# Altium PCB PCB1.PcbDoc
Units mm, origin at the board's own origin, x right, y up, seen from the top; angles counter-clockwise.
Board outline 152.4 x 101.6 mm, 2 copper layers (Top Layer, Bottom Layer); 21 components, 18 nets, 54 pads, 10 vias.
Unrouted connection lines stored in the file: 24.
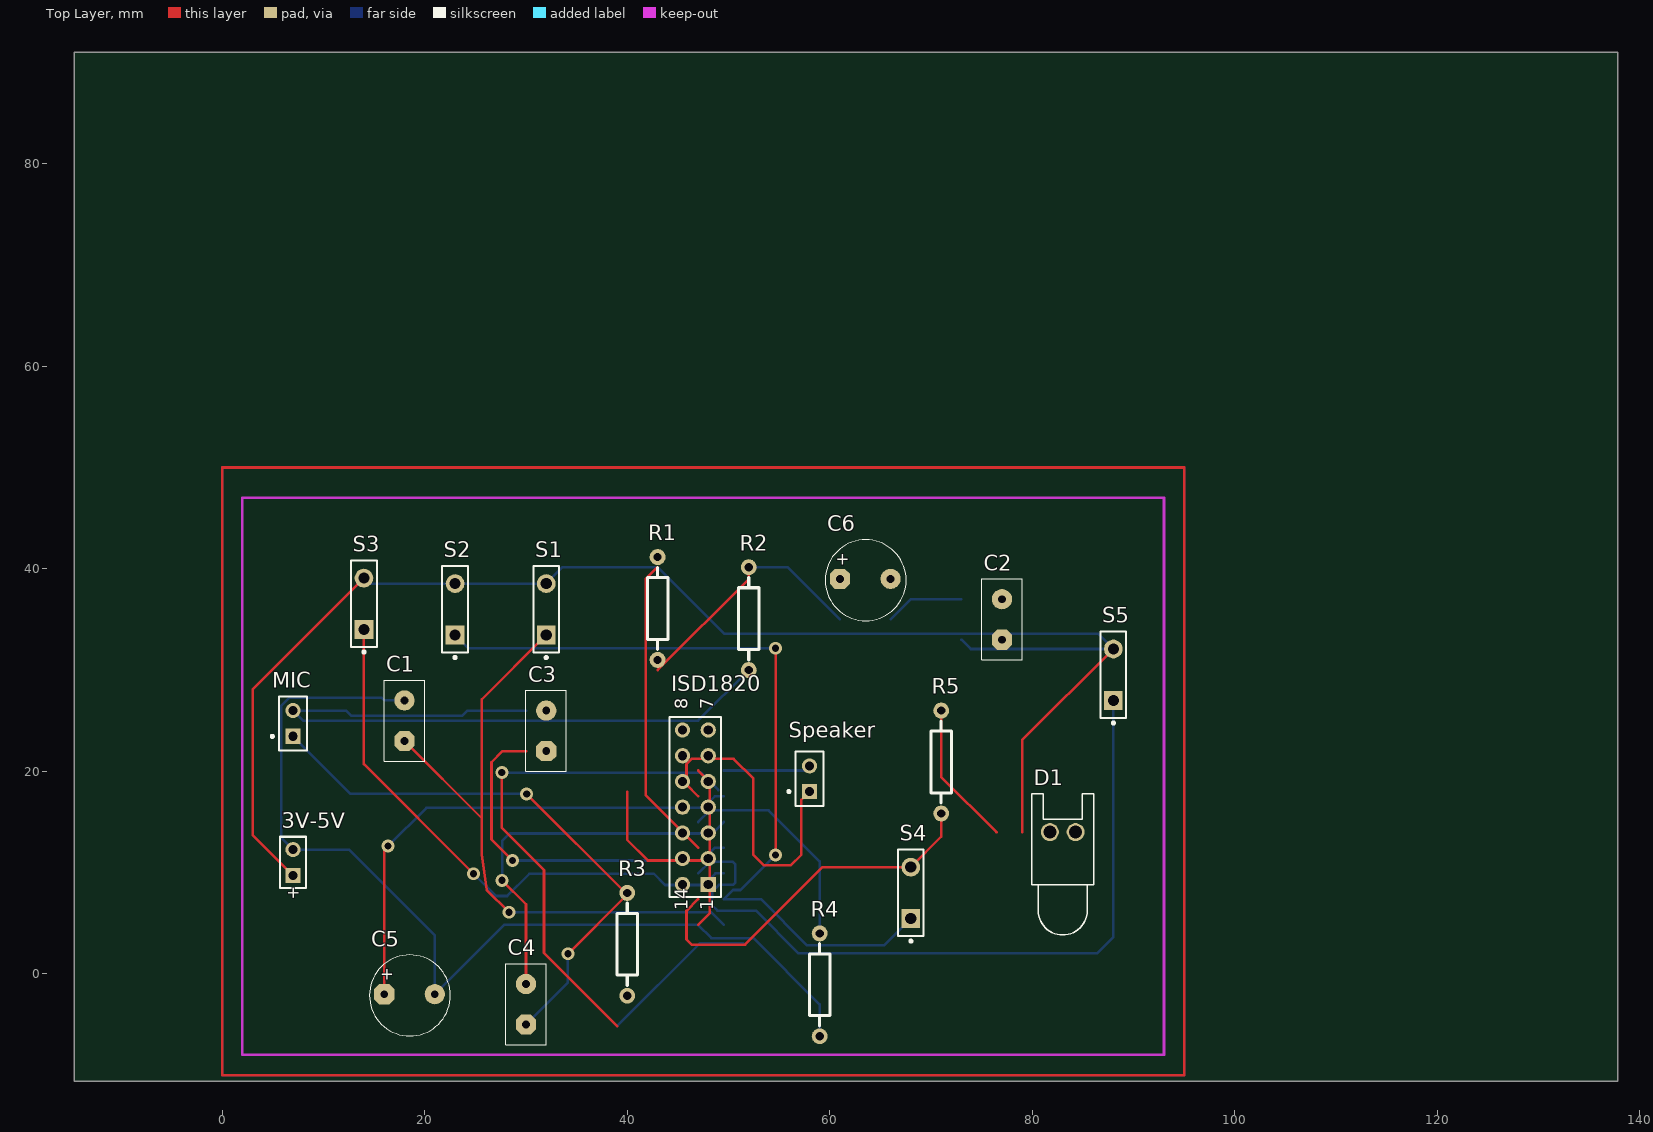
[diagram p0: Top Layer view]
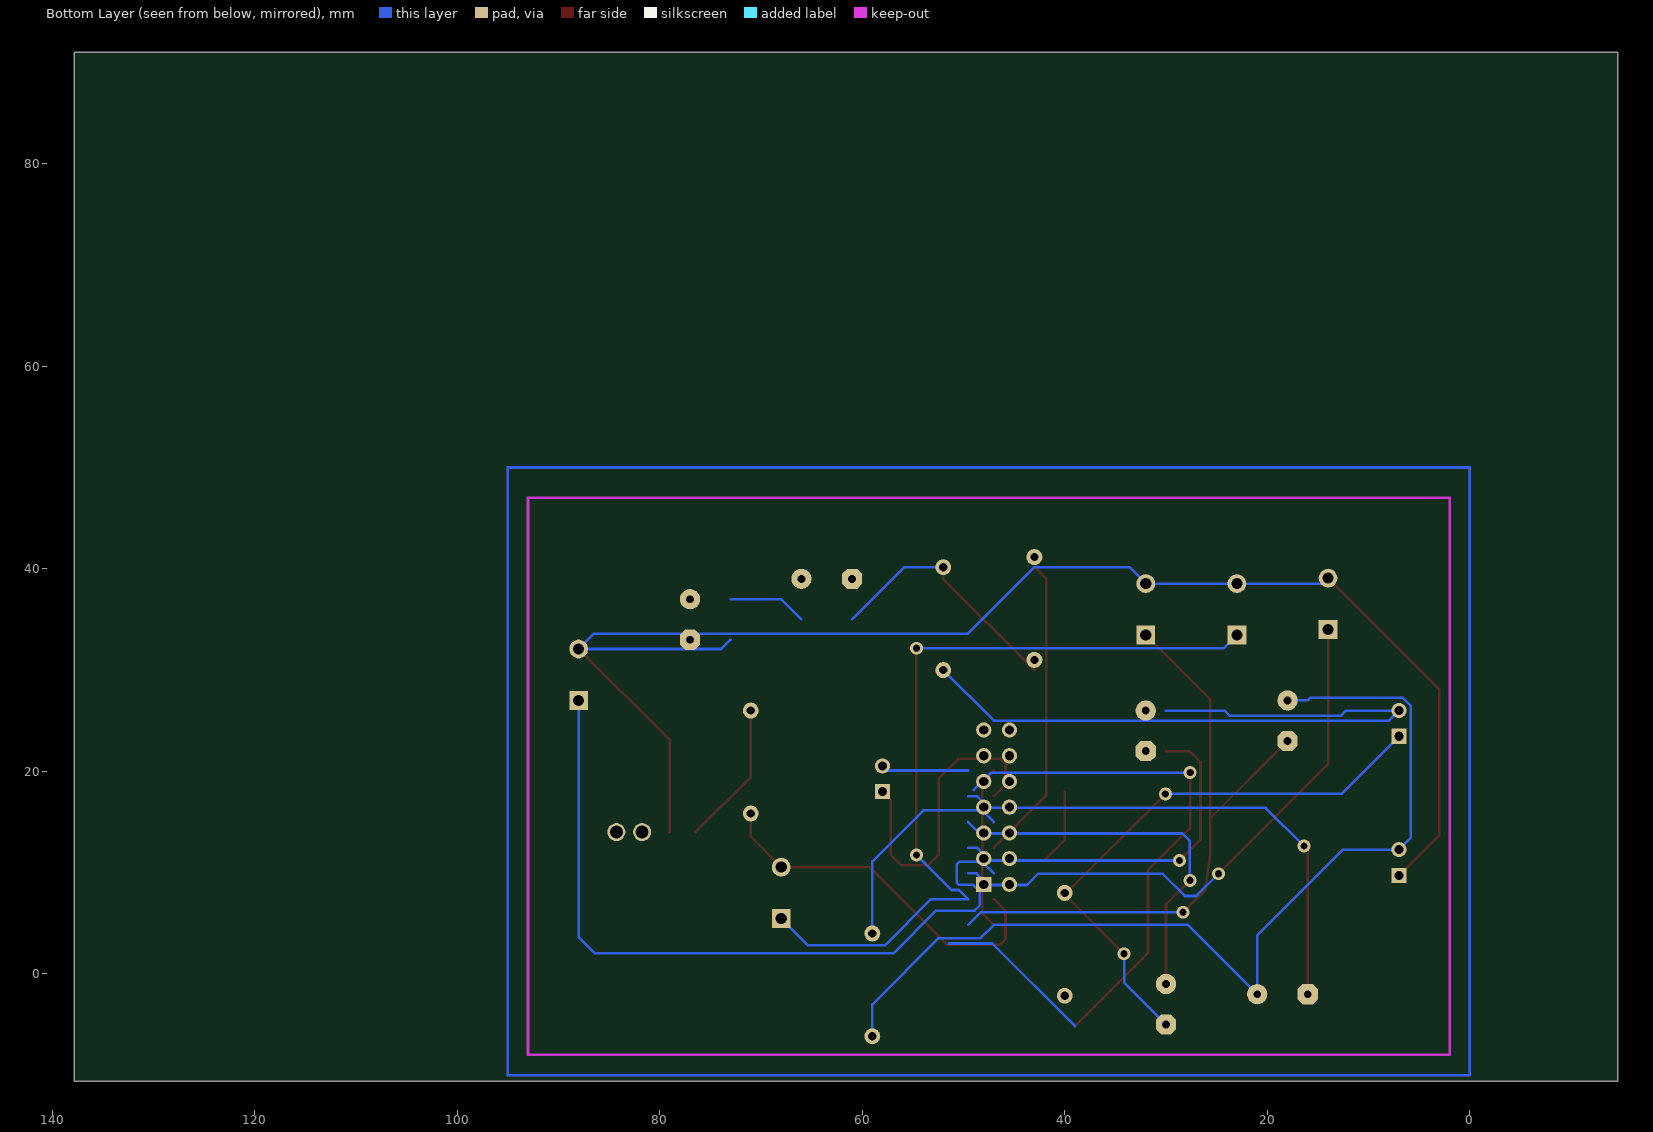
[diagram p1: Bottom Layer view, seen from below]

## Layer stack, top to bottom
Top Solder: solder mask 0.0102, Solder Resist, Dk 3.5
Top Layer: signal copper 0.0356
Dielectric 1: dielectric 0.32, FR-4, Dk 4.8
Bottom Layer: signal copper 0.0356
Bottom Solder: solder mask 0.0102, Solder Resist, Dk 3.5

## Board outline
-14.6,-10.6 137.8,-10.6 137.8,91 -14.6,91

## Design rules (kind name [scope] priority, off if disabled: settings)
Clearance [All] p1: gap=0.254
PolygonConnect [All] p1: connectstyle=Relief reliefconductorwidth=0.254 reliefentries=4 polygonreliefangle="90 Angle" airgapwidth=0.254
RoomDefinition Sheet1 [InComponentClass('Sheet1')] p1: confinementstyle=ConfineIn formatcopy=TRUE lockcomponents=FALSE outline -40,-36 10.8,-36 10.8,-10.6 -40,-10.6
RoutingVias [All] p1: holewidth=0.711 width=1.27 viastyle="Through Hole" minholewidth=0.711 minwidth=1.27 maxholewidth=0.711 maxwidth=1.27
SolderMaskExpansion [All] p1: expansion=0.102
Width [All] p1: maxlimit=0.254 minlimit=0.254 preferedwidth=0.254
30 further rules are at their usual default settings.

## Components (designator, comment, footprint, x,y, rotation, side; value= is the part's Value field where it differs from the comment)
3V-5V "Battery" BAT-2 7,11 r90 top
C1 "0.001uf" RAD4 18,23 r90 top
C2 "0.1uf" RAD4 77,33 r90 top
C3 "0.1uf" RAD4 32,22 r90 top
C4 "0.1uf" RAD4 30,-5 r90 top
C5 "4.7uf" RB5/8 16,-2 r0 top
C6 "220uf" RB5/8 61,39 r0 top
D1 "LED0" LED-0 83,14 r0 top
ISD1820 "" HDR2X7_CEN 48,8.84 r90 top
MIC "MIC" PIN2 7,23.46 r90 top
R1 "1K" AXIAL0.4 43,31 r90 top
R2 "4.7k" AXIAL0.4 52,30 r90 top
R3 "4.7K" AXIAL0.4 40,-2.16 r90 top
R4 "100K" AXIAL0.4 59,-6.16 r90 top
R5 "10K" AXIAL0.4 71,15.84 r90 top
S1 "REC" SPST-2 32,36 r90 top
S2 "PLAYE" SPST-2 23,36 r90 top
S3 "PLAYL" SPST-2 14,36.54 r90 top
S4 "循环放音" SPST-2 68,8 r90 top
S5 "直通" SPST-2 88,29.54 r90 top
Speaker "8欧0.5W" PIN2 58,18 r90 top

## Footprints (in the part's own frame and the unit in brackets; to place one, negate y for a bottom-side part, rotate by r counter-clockwise, add the part's x,y. Pads: shape width x height; smd on the part's side, far side on the other; paste and mask are expansions set on the pad)
AXIAL0.4 [mil]
  round 62 hole 32: 1(0,0) 2(400,0)
  silkscreen extent 40,-40 360,40
BAT-2 [mm] "Battery; 2 Leads"
  rect 1.5x1.5 hole 0.9: 1(-1.27,0)
  round 1.5 hole 0.9: 2(1.27,0)
  silkscreen extent -2.54,-1.27 2.54,1.27
HDR2X7_CEN [mm] "Connector; Header; 7x2 Position"
  rect 1.5x1.5 hole 0.9: 1(0,0)
  round 1.5 hole 0.9: 2(2.54,0) 3(5.08,0) 4(7.62,0) 5(10.16,0) 6(12.7,0) 7(15.24,0) 8(15.24,2.54) 9(12.7,2.54) 10(10.16,2.54) 11(7.62,2.54) 12(5.08,2.54) 13(2.54,2.54) 14(0,2.54)
  silkscreen extent -1.27,-1.27 16.51,3.81
LED-0 [mil] "LED; 2 Leads"
  round 70 hole 50: 1(50.01,0) 2(-49.99,0)
  silkscreen extent -120,-400 120,150
PIN2 [mm] "Photosensitive Diode; 2 Leads"
  rect 1.5x1.5 hole 0.9: 1(0,0)
  round 1.5 hole 0.9: 2(2.54,0)
  silkscreen extent -1.4,-1.4 3.94,2.17
RAD4 [mm]
  oct 2x2 hole 0.762: 1(0,0)
  round 2 hole 0.762: 2(4,0)
  silkscreen extent -2,-2 6,2
RB5/8 [mm]
  oct 2x2 hole 0.762: 1(0,0)
  round 2 hole 0.762: 2(5,0)
  silkscreen extent -1.46,-4.13 6.54,3.87
SPST-2 [mm] "Switch; 2 Leads"
  rect 1.85x1.85 hole 1.1: 1(-2.54,0)
  round 1.85 hole 1.1: 2(2.54,0)
  silkscreen extent -4.89,-1.27 4.28,1.27

## Part data
3V-5V: "Multicell Battery"
C1 C2 C3 C4: library part CAP, "Capacitor"
C5 C6: library part ELECTRO2, "Electrolytic Capacitor"
D1: "Typical INFRARED GaAs LED"
ISD1820: library part "Header 7X2A", "Header, 7-Pin, Dual row"
MIC: library part Mic2, "Microphone"
R1 R2 R3 R4 R5: library part RES2
S1 S2 S3: library part SW-PB, "Switch"
S4 S5: library part SW-SPST, "Single-Pole, Single-Throw Switch"
Speaker: library part Speaker, "Loudspeaker"

## Via types
v1: diameter 1.27, hole 0.711, Top Layer to Bottom Layer, 10 vias

## Nets (pads, with @x,y where several pads share a name; then routed paths per layer and width w, separated by ;. In a path a pad name is that pad's centre, name@x,y a point inside that pad or via, vN(x,y) a via of type N, cw(c..) or ccw(c..) an arc to the next point about the centre after c; other vN are vias at no path point)
GND: C2.2 C6.2 | length 7.8
  Bottom Layer w0.254: 66,35 68,37 73,37
Net3V-5V_1: 3V-5V.1 C2.1 D1.1 ISD1820.11 R1.2 S1.2 S2.2 S3.2 S5.2 | length 181.7
  Top Layer w0.254: 3V-5V.1 3,13.73 3,28.08 S3.2 ; 43,40.16 41.813,38.973 41.813,17.647 47,12.46 ; 79,14 79,23.08 S5.2
  Bottom Layer w0.254: S3.2 14,38.524 18.734,38.524 18.75,38.54 S2.2 S1.2 33.62,40.16 43,40.16 49.564,33.596 86.484,33.596 S5.2 73.92,32.08 73,33
Net3V-5V_2: 3V-5V.2 C1.2 C5.2 ISD1820.8 ISD1820.14 R3.2 R4.1 | length 128
  Top Layer w0.254: 40,18 40,13.235 42.042,11.193 47.579,11.193 48.138,11.752 ; 47,4.84 48.138,5.978 48.138,11.752 ; 47,20.08 48.138,18.942 48.138,11.752
  Bottom Layer w0.254: C1.2 16.024,27 15.753,27.271 6.634,27.271 5.847,26.484 5.847,13.423 3V-5V.2 12.514,12.27 21,3.784 C5.2 27.84,4.84 47,4.84 48.318,3.522 52.456,3.522 59,-3.022 R4.1
NetC1_1: C1.1 ISD1820.1 S1.1 | length 63.5
  Top Layer w0.254: C1.1 25.634,15.366 ; v1(28.326,6.088) 26.108,8.305 25.634,11.795 25.634,15.366 ; S1.1 25.634,27.094 25.634,15.366
  Bottom Layer w0.254: v1(28.326,6.088) 48.292,6.088 49.54,4.84
NetC3_1: C3.1 ISD1820.4 | length 35.8
  Top Layer w0.254: v1(28.674,11.193) 26.599,13.268 26.599,20.896 27.703,22 30,22
  Bottom Layer w0.254: v1(28.674,11.193) 47.396,11.193 48.663,12.46 49.54,12.46
NetC3_2: C3.2 MIC.2 R2.1 | length 70.9
  Bottom Layer w0.254: 30,26 24.235,26 23.729,25.493 12.729,25.493 12.222,26 MIC.2 8,25 47,25 R2.1
NetC4_1: C4.1 MIC.1 R3.1 | length 56.5
  Top Layer w0.254: v1(30.068,17.772) 40,7.84 v1(34.143,1.983)
  Bottom Layer w0.254: MIC.1 12.688,17.772 v1(30.068,17.772) ; C4.1 34.143,-0.857 v1(34.143,1.983)
NetC4_2: C4.2 ISD1820.5 | length 37.8
  Top Layer w0.254: v1(27.64,9.237) 30,6.878 C4.2
  Bottom Layer w0.254: v1(27.64,9.237) 27.64,13.124 28.377,13.86 48.4,13.86 49.54,15
NetC5_1: C5.1 ISD1820.6 | length 50
  Top Layer w0.254: C5.1 16,12.228 v1(16.388,12.616)
  Bottom Layer w0.254: v1(16.388,12.616) 20.173,16.4 47.528,16.4 48.668,17.54 49.54,17.54
NetC6_1: C6.1 R1.1 R2.2 | length 25
  Top Layer w0.254: 43,30 52,39 R2.2
  Bottom Layer w0.254: R2.2 55.84,40.16 61,35
NetD1_2: D1.2 R5.2 | length 14.3
  Top Layer w0.254: R5.2 71,19.46 76.46,14
NetISD1820_2: ISD1820.2 S2.1 S4.1 | length 81
  Top Layer w0.254: v1(54.65,11.752) v1(54.65,32.148)
  Bottom Layer w0.254: S2.1 24.312,32.148 v1(54.65,32.148) ; v1(54.65,11.752) 51.179,8.281 50.441,8.281 49.54,7.38 53.196,7.38 57.765,2.811 65.351,2.811 S4.1
NetISD1820_3: ISD1820.3 S3.1 | length 56.1
  Top Layer w0.254: S3.1 14,20.71 v1(24.821,9.889)
  Bottom Layer w0.254: v1(24.821,9.889) 27.022,7.688 28.139,7.688 30.34,9.889 42.635,9.889 43.744,8.78 47.553,8.78 48.693,9.92 49.54,9.92
NetISD1820_7: ISD1820.7 Speaker.2 | length 8.7
  Bottom Layer w0.254: 49.54,20.08 57.54,20.08 Speaker.2
NetISD1820_9: ISD1820.9 Speaker.1 | length 31
  Top Layer w0.254: 47,17.54 45.852,18.688 45.852,20.718 46.36,21.226 50.5,21.226 52.456,19.27 52.456,11.752 53.472,10.736 56.164,10.736 57.18,11.752 57.18,17.18 Speaker.1
NetISD1820_10: ISD1820.10 R4.2 | length 21.7
  Bottom Layer w0.254: 47,15 48.146,16.146 53.955,16.146 59,11.101 R4.2
NetISD1820_12: ISD1820.12 S5.1 | length 75.7
  Bottom Layer w0.254: 47,9.92 48.146,11.066 50.424,11.066 50.678,10.812 50.678,9.043 50.424,8.789 49.061,8.789 48.392,8.12 48.392,6.757 48.9,6.249 52.701,6.249 56.926,2.024 86.4,2.024 88,3.624 S5.1
NetISD1820_13: ISD1820.13 R5.1 S4.2 | length 36.5
  Top Layer w0.254: 47,7.38 45.852,6.232 45.852,3.395 46.36,2.887 51.643,2.887 59.296,10.54 S4.2 71,13.54 R5.1
copper on no net: | length 67.7
  Top Layer w0.254: v1(27.615,19.88) 27.615,14.419 31.78,10.253 31.78,2.06 39,-5.16
  Bottom Layer w0.254: v1(27.615,19.88) 47.28,19.88 49,18.16 ; 39,-5.16 47.16,3 51.46,3

## Keep-outs
Keep-Out Layer:
  lines w0.254: 2,-8 2,47 93,47 93,-8 2,-8

## Other copper
Multi-Layer:
  lines w0.254: 0,-10 0,50 95,50 95,-10 0,-10

## Text inside footprints (layer, text, board x,y; h text height)
3V-5V: Top Overlay "+" at 7.577,7.33 h1.15 r90
C5: Top Overlay "+" at 15.6,-0.6 h1.2
C6: Top Overlay "+" at 60.6,40.4 h1.2
ISD1820: Top Overlay "8" at 45.968,26.112 h1.27 r90; Top Overlay "7" at 48.508,26.112 h1.27 r90; Top Overlay "1" at 48.508,6.3 h1.27 r90; Top Overlay "14" at 45.968,6.3 h1.27 r90